# EAGLE board practice 1.br (EAGLE 7.2.0)

Size 100 x 80 mm. Coordinates in mm from the lower left corner, seen from the top.
Outline: 0,0 100,0 100,80 0,80 0,0
Copper layers (1*16): Top 0.035mm / dielectric 1.5mm / Bottom 0.035mm
Design rules "default": minimum track width 10mil, minimum drill 24mil, track to track 8mil, track to pad 8mil, pad to pad 8mil, via to via 8mil, smd to smd 8mil, copper to edge 40mil, drill to drill 8mil, minimum pad ring 10mil, minimum via ring 8mil, stop-mask expansion 4mil, vias tented up to drill 0mil, thermal gap 10mil

## Footprints (pad centres in the part's own frame; a part is rotated, then mirrored left to right if it is on the bottom)
E3,5-8 = drill 0.813 pad 1.6: + -1.778,0 | drill 0.813 pad 1.6 octagon: - 1.778,0
DO41-10 = drill 1.118: A 5.08,0; C -5.08,0
1X02 = drill 1.016 long: 1 -1.27,0; 2 1.27,0
LED5MM = drill 0.813 octagon: A -1.27,0; K 1.27,0
0207/10 = drill 0.813 octagon: 1 -5.08,0; 2 5.08,0

## Placement (x,y rotation side)
C1  1000uf  [E3,5-8]  -19.05,5.08 0 top  (outside the outline)
D1  1N4004  [DO41-10]  -19.05,21.59 0 top  (outside the outline)
INPUT_SUPPLY  12V_AC  [1X02]  -25.4,13.97 0 top  (outside the outline)
LED1  [LED5MM]  -21.59,29.21 0 top  (outside the outline)
R1  10k  [0207/10]  -19.05,34.29 0 top  (outside the outline)

## Library data of the parts
C1 R1 = rcl
D1 = diode
INPUT_SUPPLY = pinhead
LED1 = led

## Nets
12V_AC: C1.- INPUT_SUPPLY.2 R1.1
N$1: D1.A INPUT_SUPPLY.1
N$2: C1.+ D1.C LED1.A

## Tracks (layer width: path | path; a pad name or v marks a point on that pad's centre or on a via)
12V_AC  (2 unrouted)
N$1  (1 unrouted)
N$2  (2 unrouted)